# EAGLE board HominiPulseSensor_Panelized (EAGLE 8.0.1)
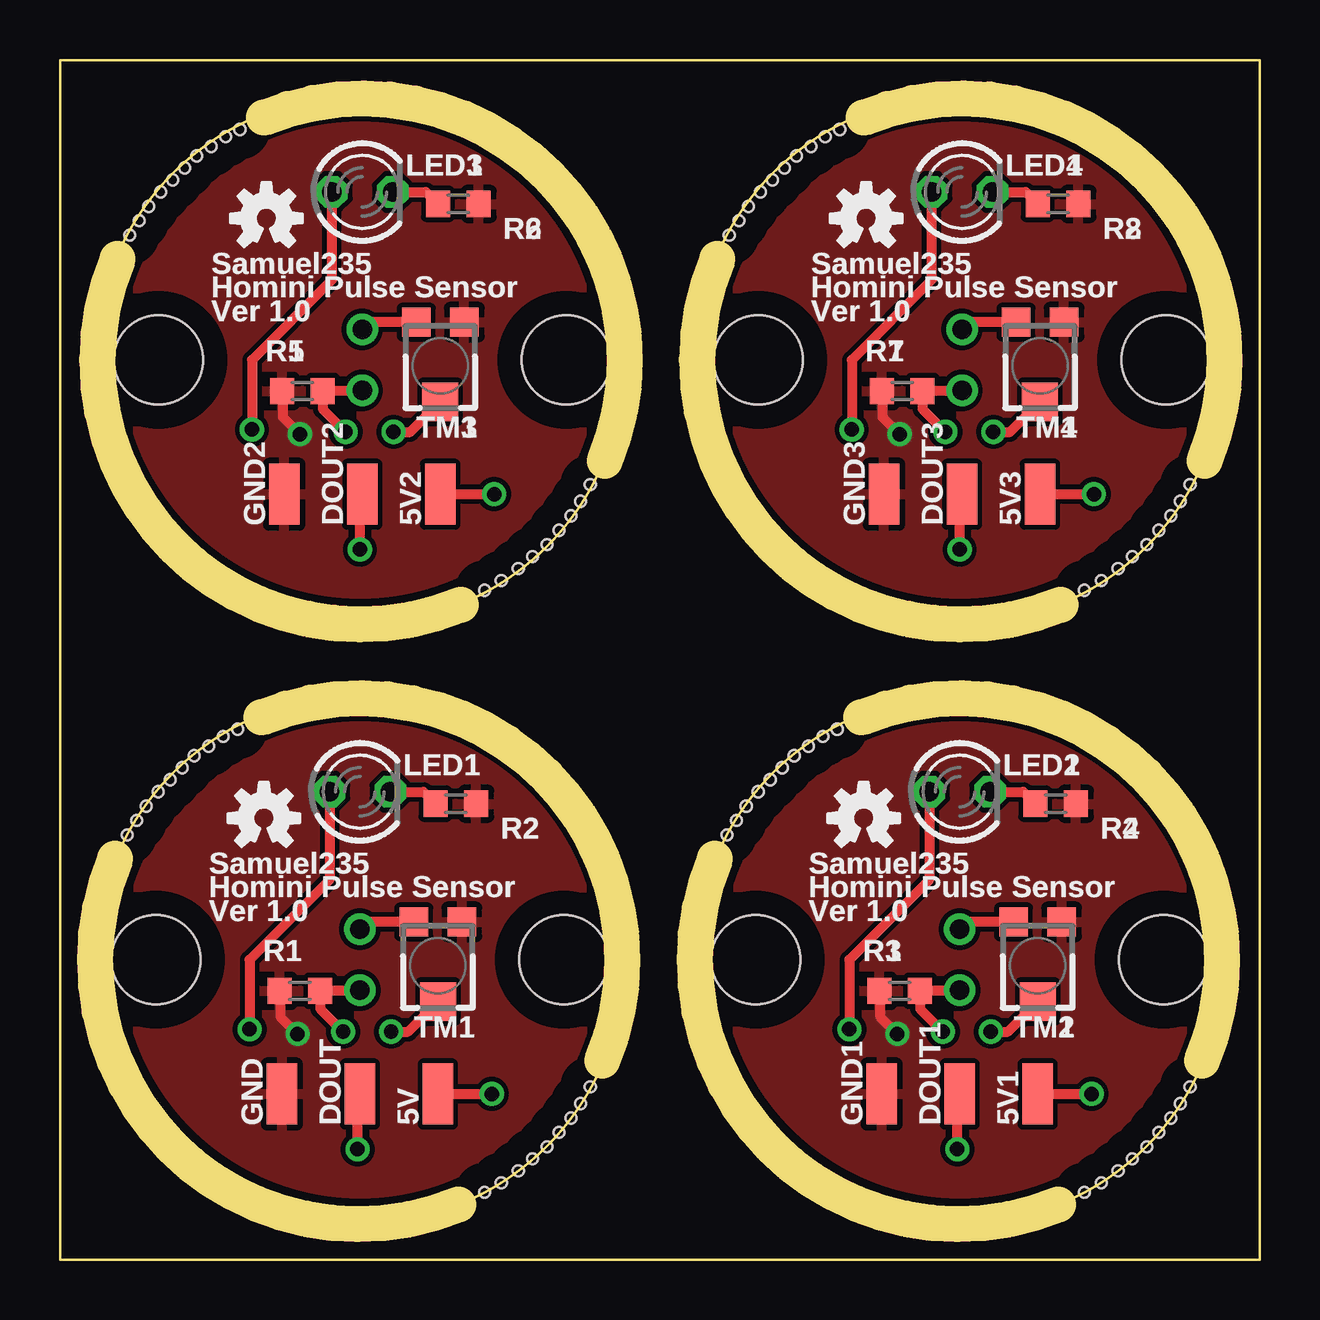
[diagram p0: board, top side]
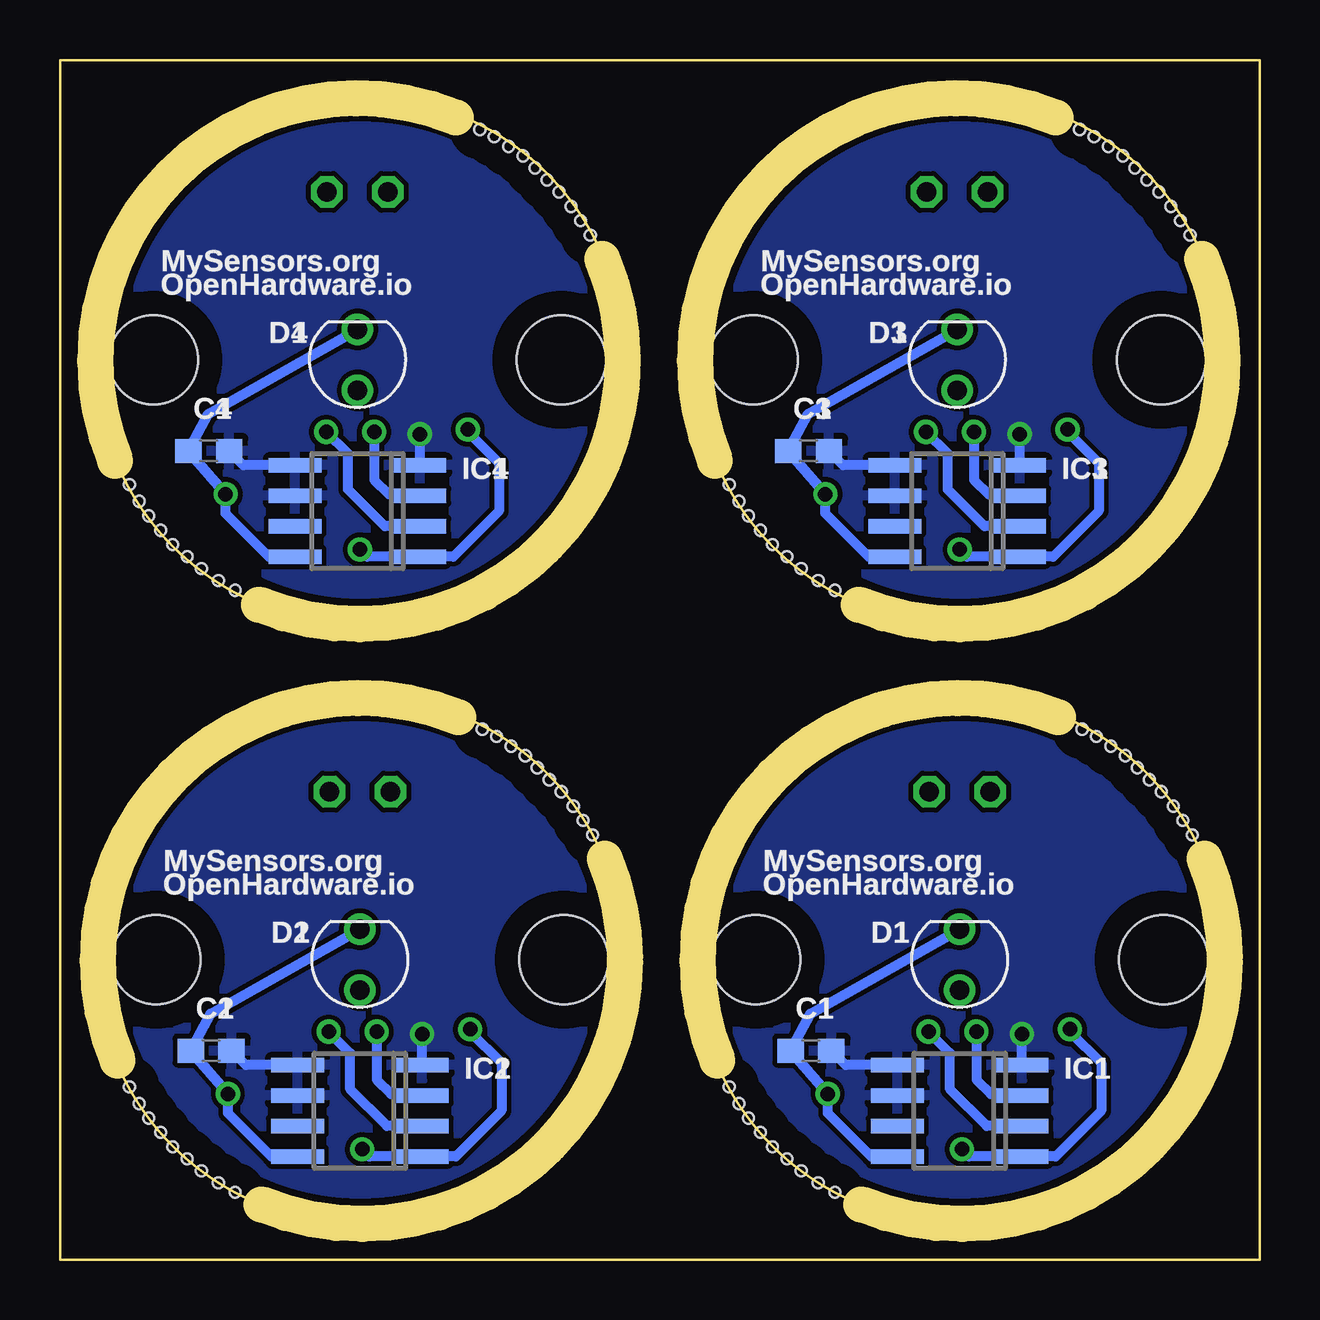
[diagram p1: board, bottom side, seen from below]

Size 50 x 50 mm. Coordinates in mm from the lower left corner, seen from the top.
Outline: 0,0 0,50 50,50 50,0 0,0
Outline: circle at 12.5,12.5 radius 11
Outline: circle at 37.5,12.5 radius 11
Outline: circle at 37.5,37.5 radius 11
Outline: circle at 12.5,37.5 radius 11
Copper layers (1*16): Top 0.035mm / dielectric 1.5mm / Bottom 0.035mm
Design rules "default *": minimum track width 10mil, minimum drill 0.3mm, track to track 8mil, track to pad 8mil, pad to pad 8mil, via to via 8mil, smd to smd 8mil, copper to edge 40mil, drill to drill 8mil, minimum pad ring 10mil, minimum via ring 8mil, stop-mask expansion 4mil, vias tented up to drill 0mil, thermal gap 10mil
Holes 3.7 mm at 4,12.5 21,12.5 29,12.5 46,12.5 4.1,37.5 21.1,37.5 29.1,37.5 46.1,37.5
Holes 0.45 mm at 21.7,6.5 17.7,2.8 22.1,7.2 2.8,17.7 7.4,22.1 3.2,18.3 3.6,18.9 4.1,19.5 4.6,20 5.1,20.5 5.6,21 6.2,21.4 6.8,21.8 18.4,3.2 19.1,3.7 19.7,4.2 20.3,4.7 20.8,5.3 21.3,5.9 46.7,31.6 42.7,27.9 47.1,32.3 27.9,42.7 32.5,47.1 28.3,43.3 28.7,43.9 29.2,44.5 29.7,45 30.2,45.5 30.7,46 31.3,46.4 31.9,46.8 43.4,28.3 44.1,28.8 44.7,29.3 45.3,29.8 45.8,30.4 46.3,31 46.7,6.5 42.7,2.8 47.1,7.2 27.8,17.7 32.4,22.1 28.2,18.3 28.6,18.9 29.1,19.5 29.6,20 30.1,20.5 30.6,21 31.2,21.4 31.8,21.8 43.4,3.2 44.1,3.7 44.7,4.2 45.3,4.7 45.8,5.3 46.3,5.9 21.7,31.6 17.7,27.9 22.1,32.3 2.9,42.7 7.5,47.1 3.3,43.3 3.7,43.9 4.2,44.5 4.7,45 5.2,45.5 5.7,46 6.3,46.4 6.9,46.8 18.4,28.3 19.1,28.8 19.7,29.3 20.3,29.8 20.8,30.4 21.3,31
Milling: 8 lines

## Footprints (pad centres in the part's own frame; a part is rotated, then mirrored left to right if it is on the bottom)
SMD1,27-2,54 = smd 1.27 x 2.54: 1 0,0
C0603 = smd 1.1 x 1: 1 -0.85,0; 2 0.85,0
3MM-PTH = drill 0.8: A -1.27,0; C 1.27,0
SO08 = smd 0.6 x 2.2: 1 -1.905,-2.6; 2 -0.635,-2.6; 3 0.635,-2.6; 4 1.905,-2.6; 5 1.905,2.6; 6 0.635,2.6; 7 -0.635,2.6; 8 -1.905,2.6
LED3MM = drill 0.813 octagon: A -1.27,0; K 1.27,0
R0603 = smd 1 x 1.1: 1 -0.85,0; 2 0.85,0
TC33X = smd 1.2 x 1.2: 1 -1,-1.825; 3 1,-1.825 | smd 1.5 x 1.6: 2 0,1.5

## Placement (x,y rotation side)
5V  [SMD1,27-2,54]  15.75,6.9 0 top
5V1  [SMD1,27-2,54]  40.75,6.9 0 top
5V2  [SMD1,27-2,54]  15.85,31.9 0 top
5V3  [SMD1,27-2,54]  40.85,31.9 0 top
C1  0.1uF  [C0603]  18.7,8.7 0 bottom
C2  0.1uF  [C0603]  43.7,8.7 0 bottom
C3  0.1uF  [C0603]  18.8,33.7 0 bottom
C4  0.1uF  [C0603]  43.8,33.7 0 bottom
D1  PD204-6C  [3MM-PTH]  12.5,12.5 90 bottom
D2  PD204-6C  [3MM-PTH]  37.5,12.5 90 bottom
D3  PD204-6C  [3MM-PTH]  12.6,37.5 90 bottom
D4  PD204-6C  [3MM-PTH]  37.6,37.5 90 bottom
DOUT  [SMD1,27-2,54]  12.5,6.9 0 top
DOUT1  [SMD1,27-2,54]  37.5,6.9 0 top
DOUT2  [SMD1,27-2,54]  12.6,31.9 0 top
DOUT3  [SMD1,27-2,54]  37.6,31.9 0 top
GND  [SMD1,27-2,54]  9.25,6.9 0 top
GND1  [SMD1,27-2,54]  34.25,6.9 0 top
GND2  [SMD1,27-2,54]  9.35,31.9 0 top
GND3  [SMD1,27-2,54]  34.35,31.9 0 top
IC1  LM393D  [SO08]  12.5,6.2 90 bottom
IC2  LM393D  [SO08]  37.5,6.2 90 bottom
IC3  LM393D  [SO08]  12.6,31.2 90 bottom
IC4  LM393D  [SO08]  37.6,31.2 90 bottom
LED1  Red  [LED3MM]  12.5,19.5 0 top
LED2  Red  [LED3MM]  37.5,19.5 0 top
LED3  Red  [LED3MM]  12.6,44.5 0 top
LED4  Red  [LED3MM]  37.6,44.5 0 top
LOGO1  OSHW-LOGOS  [OSHW-LOGO-S]  8.5,18.4 0 top
LOGO2  OSHW-LOGOS  [OSHW-LOGO-S]  33.5,18.4 0 top
LOGO3  OSHW-LOGOS  [OSHW-LOGO-S]  8.6,43.4 0 top
LOGO4  OSHW-LOGOS  [OSHW-LOGO-S]  33.6,43.4 0 top
R1  33k  [R0603]  10,11.2 0 top
R2  180R  [R0603]  16.5,19 180 top
R3  33k  [R0603]  35,11.2 0 top
R4  180R  [R0603]  41.5,19 180 top
R5  33k  [R0603]  10.1,36.2 0 top
R6  180R  [R0603]  16.6,44 180 top
R7  33k  [R0603]  35.1,36.2 0 top
R8  180R  [R0603]  41.6,44 180 top
TM1  10k  [TC33X]  15.75,12.25 180 top
TM2  10k  [TC33X]  40.75,12.25 180 top
TM3  10k  [TC33X]  15.85,37.25 180 top
TM4  10k  [TC33X]  40.85,37.25 180 top

## Library data of the parts
5V 5V1-5V3 DOUT DOUT1-DOUT3 GND GND1-GND3 = wirepad
C1-C4 R1-R8 = rcl
D1-D4 = Misc
IC1-IC4 = linear
LED1-LED4 = led
LOGO1-LOGO4 = SparkFun-Aesthetics
TM1-TM4 = adafruit

## Nets
+5V: 5V.1 C1.1 D1.C IC1.8 TM1.3
+5V1: 5V1.1 C2.1 D2.C IC2.8 TM2.3
+5V2: 5V2.1 C3.1 D3.C IC3.8 TM3.3
+5V3: 5V3.1 C4.1 D4.C IC4.8 TM4.3
GND: C1.2 GND.1 IC1.4 IC1.5 IC1.6 R1.1 R2.1 TM1.1
GND1: C2.2 GND1.1 IC2.4 IC2.5 IC2.6 R3.1 R4.1 TM2.1
GND2: C3.2 GND2.1 IC3.4 IC3.5 IC3.6 R5.1 R6.1 TM3.1
GND3: C4.2 GND3.1 IC4.4 IC4.5 IC4.6 R7.1 R8.1 TM4.1
N$1: D1.A IC1.3 R1.2
N$2: IC1.2 TM1.2
N$3: D2.A IC2.3 R3.2
N$4: DOUT.1 IC1.1 LED1.A
N$5: LED1.K R2.2
N$6: DOUT1.1 IC2.1 LED2.A
N$7: LED2.K R4.2
N$8: IC2.2 TM2.2
N$9: D3.A IC3.3 R5.2
N$10: DOUT2.1 IC3.1 LED3.A
N$11: LED3.K R6.2
N$12: IC3.2 TM3.2
N$13: D4.A IC4.3 R7.2
N$14: DOUT3.1 IC4.1 LED4.A
N$15: LED4.K R8.2
N$16: IC4.2 TM4.2

## Tracks (layer width: path | path; a pad name or v marks a point on that pad's centre or on a via)
+5V  (via drill 0.6)
  Top 0.406: 5V.1 v18,6.9 | TM1.3 12.8,14.07 D1.C
  Bottom 0.406: IC1.8 16.2,4.29 18,6.1 v18,6.9 C1.1 18.72,10.25 D1.C
+5V1  (via drill 0.6)
  Top 0.406: 5V1.1 v43,6.9 | TM2.3 37.8,14.07 D2.C
  Bottom 0.406: IC2.8 41.2,4.29 43,6.1 v43,6.9 C2.1 43.72,10.25 D2.C
+5V2  (via drill 0.6)
  Top 0.406: 5V2.1 v18.1,31.9 | TM3.3 12.9,39.08 D3.C
  Bottom 0.406: IC3.8 16.3,29.3 18.1,31.1 v18.1,31.9 C3.1 18.82,35.25 D3.C
+5V3  (via drill 0.6)
  Top 0.406: 5V3.1 v43.1,31.9 | TM4.3 37.91,39.08 D4.C
  Bottom 0.406: IC4.8 41.3,29.3 43.1,31.1 v43.1,31.9 C4.1 43.82,35.25 D4.C
GND  (via drill 0.6)
  Top 0.406: v9.9,9.4 9.2,10.1 9.2,11.15 R1.1
  Bottom 0.406: IC1.4 v9.9,9.4 | IC1.5 17.25,8.11 C1.2
  pour Top: 3.8,19.5 5.8,21.3 8,22.5 10.2,23.2 13.1,23.4 15.7,23 17.7,22.2 19.6,20.9 20.9,19.5 22.2,17.7 23,16 23.4,13.9 23.5,11.7 23.2,9.7 22.5,7.8 21.4,5.9 20.1,4.5 17.5,2.7 15.3,1.8 12.7,1.4 9.8,1.7 7.6,2.5 6.1,3.4 4.5,4.8 2.7,7.4 1.9,9.6 1.5,12.5 1.8,15.1 2.7,17.5
  pour Bottom: 4.3,20 6.1,21.5 8.1,22.5 9.9,23.2 12.2,23.5 14.9,23.2 17.5,22.3 19.4,21.1 20.8,19.7 22.2,17.7 23.1,15.5 23.5,13.1 23.4,11 23,9.1 22.1,6.9 21.3,5.8 20.4,4.9 18.6,3.3 17,2.5 15,1.7 12.5,1.5 10.4,1.7 8.5,2.3 7,2.9 5.7,3.8 4.4,5 3.3,6.5 2.4,8 1.9,9.6 1.5,11.2 1.5,13.6 2.1,16.2 3.1,18.3
GND1  (via drill 0.6)
  Top 0.406: v34.9,9.4 34.2,10.1 34.2,11.15 R3.1
  Bottom 0.406: IC2.4 v34.9,9.4 | IC2.5 42.26,8.11 C2.2
  pour Top: 28.8,19.5 30.8,21.3 33,22.5 35.2,23.2 38.1,23.4 40.7,23 42.7,22.2 44.6,20.9 45.9,19.5 47.2,17.7 48,16 48.4,13.9 48.5,11.7 48.2,9.7 47.5,7.8 46.4,5.9 45.1,4.5 42.5,2.7 40.3,1.8 37.7,1.4 34.8,1.7 32.6,2.5 31.1,3.4 29.5,4.8 27.7,7.4 26.9,9.6 26.5,12.5 26.8,15.1 27.7,17.5
  pour Bottom: 29.3,20 31.1,21.5 33.1,22.5 34.9,23.2 37.2,23.5 39.9,23.2 42.5,22.3 44.4,21.1 45.8,19.7 47.2,17.7 48.1,15.5 48.5,13.1 48.4,11 48,9.1 47.1,6.9 46.3,5.8 45.4,4.9 43.6,3.3 42,2.5 40,1.7 37.5,1.5 35.4,1.7 33.5,2.3 32,2.9 30.7,3.8 29.4,5 28.3,6.5 27.4,8 26.9,9.6 26.5,11.2 26.5,13.6 27.1,16.2 28.1,18.3
GND2  (via drill 0.6)
  Top 0.406: v10,34.4 9.3,35.1 9.3,36.15 R5.1
  Bottom 0.406: IC3.4 v10,34.4 | IC3.5 17.36,33.1 C3.2
  pour Top: 3.9,44.5 5.9,46.3 8.1,47.5 10.3,48.2 13.2,48.4 15.8,48 17.8,47.2 19.7,45.9 21,44.5 22.3,42.7 23.1,41 23.5,38.9 23.6,36.7 23.3,34.7 22.6,32.8 21.5,30.9 20.2,29.5 17.6,27.7 15.4,26.8 12.8,26.4 9.9,26.7 7.7,27.5 6.2,28.4 4.6,29.8 2.8,32.4 2,34.6 1.6,37.5 1.9,40.1 2.8,42.5
  pour Bottom: 4.4,45 6.2,46.5 8.2,47.5 10,48.2 12.3,48.5 15,48.2 17.6,47.3 19.5,46.1 20.9,44.7 22.3,42.7 23.2,40.5 23.6,38.1 23.5,36 23.1,34.1 22.2,31.9 21.4,30.8 20.5,29.9 18.7,28.3 17.1,27.5 15.1,26.7 12.6,26.5 10.5,26.7 8.6,27.3 7.1,27.9 5.8,28.8 4.5,30 3.4,31.5 2.5,33 2,34.6 1.6,36.2 1.6,38.6 2.2,41.2 3.2,43.3
GND3  (via drill 0.6)
  Top 0.406: v35,34.4 34.3,35.1 34.3,36.15 R7.1
  Bottom 0.406: IC4.4 v35,34.4 | IC4.5 42.35,33.1 C4.2
  pour Top: 28.9,44.5 30.9,46.3 33.1,47.5 35.3,48.2 38.2,48.4 40.8,48 42.8,47.2 44.7,45.9 46,44.5 47.3,42.7 48.1,41 48.5,38.9 48.6,36.7 48.3,34.7 47.6,32.8 46.5,30.9 45.2,29.5 42.6,27.7 40.4,26.8 37.8,26.4 34.9,26.7 32.7,27.5 31.2,28.4 29.6,29.8 27.8,32.4 27,34.6 26.6,37.5 26.9,40.1 27.8,42.5
  pour Bottom: 29.4,45 31.2,46.5 33.2,47.5 35,48.2 37.3,48.5 40,48.2 42.6,47.3 44.5,46.1 45.9,44.7 47.3,42.7 48.2,40.5 48.6,38.1 48.5,36 48.1,34.1 47.2,31.9 46.4,30.8 45.5,29.9 43.7,28.3 42.1,27.5 40.1,26.7 37.6,26.5 35.5,26.7 33.6,27.3 32.1,27.9 30.8,28.8 29.5,30 28.4,31.5 27.5,33 27,34.6 26.6,36.2 26.6,38.6 27.2,41.2 28.2,43.3
N$1  (via drill 0.6)
  Top 0.406: D1.A 12.47,11.2 R1.2 10.85,10.45 v11.8,9.5
  Bottom 0.406: v11.8,9.5 11.8,7.5 11.2,6.9 9.96,6.9 IC1.3
N$2  (via drill 0.6)
  Top 0.406: v13.8,9.5 14.5,9.5 TM1.2
  Bottom 0.406: IC1.2 11.37,5.57 12.9,7.1 12.9,8.6 v13.8,9.5
N$3  (via drill 0.6)
  Top 0.406: D2.A 37.47,11.2 R3.2 35.85,10.45 v36.8,9.5
  Bottom 0.406: v36.8,9.5 36.8,7.5 36.2,6.9 34.97,6.9 IC2.3
N$4  (via drill 0.6)
  Top 0.406: v12.4,4.6 12.4,6.8 DOUT.1 | LED1.A 11.23,15.83 7.9,12.5 v7.9,9.6
  Bottom 0.406: v12.4,4.6 12.1,4.29 IC1.1 8.5,4.3 6.6,6.2 6.6,8.2 7.9,9.5 v7.9,9.6
N$5
  Top 0.406: LED1.K 15.15,19.5 R2.2
N$6  (via drill 0.6)
  Top 0.406: v37.4,4.6 37.4,6.8 DOUT1.1 | LED2.A 36.23,15.83 32.9,12.5 v32.9,9.6
  Bottom 0.406: v37.4,4.6 37.09,4.29 IC2.1 33.5,4.3 31.6,6.2 31.6,8.2 32.9,9.5 v32.9,9.6
N$7
  Top 0.406: LED2.K 40.15,19.5 R4.2
N$8  (via drill 0.6)
  Top 0.406: v38.8,9.5 39.5,9.5 TM2.2
  Bottom 0.406: IC2.2 36.37,5.57 37.9,7.1 37.9,8.6 v38.8,9.5
N$9  (via drill 0.6)
  Top 0.406: D3.A 12.57,36.2 R5.2 10.95,35.45 v11.9,34.5
  Bottom 0.406: v11.9,34.5 11.9,32.5 11.3,31.9 10.06,31.9 IC3.3
N$10  (via drill 0.6)
  Top 0.406: v12.5,29.6 12.5,31.8 DOUT2.1 | LED3.A 11.33,40.83 8,37.5 v8,34.6
  Bottom 0.406: v12.5,29.6 12.2,29.3 IC3.1 8.6,29.3 6.7,31.2 6.7,33.2 8,34.5 v8,34.6
N$11
  Top 0.406: LED3.K 15.25,44.5 R6.2
N$12  (via drill 0.6)
  Top 0.406: v13.9,34.5 14.6,34.5 TM3.2
  Bottom 0.406: IC3.2 11.46,30.57 13,32.1 13,33.6 v13.9,34.5
N$13  (via drill 0.6)
  Top 0.406: D4.A 37.57,36.2 R7.2 35.95,35.45 v36.9,34.5
  Bottom 0.406: v36.9,34.5 36.9,32.5 36.3,31.9 35.06,31.9 IC4.3
N$14  (via drill 0.6)
  Top 0.406: v37.5,29.6 37.5,31.8 DOUT3.1 | LED4.A 36.33,40.83 33,37.5 v33,34.6
  Bottom 0.406: v37.5,29.6 37.2,29.3 IC4.1 33.6,29.3 31.7,31.2 31.7,33.2 33,34.5 v33,34.6
N$15
  Top 0.406: LED4.K 40.25,44.5 R8.2
N$16  (via drill 0.6)
  Top 0.406: v38.9,34.5 39.6,34.5 TM4.2
  Bottom 0.406: IC4.2 36.47,30.57 38,32.1 38,33.6 v38.9,34.5

## Text on the board
tNames: Samuel235 / Homini Pulse Sensor / Ver 1.0 | Samuel235 / Homini Pulse Sensor / Ver 1.0 | Samuel235 / Homini Pulse Sensor / Ver 1.0 | Samuel235 / Homini Pulse Sensor / Ver 1.0
bNames: MySensors.org / OpenHardware.io | MySensors.org / OpenHardware.io | MySensors.org / OpenHardware.io | MySensors.org / OpenHardware.io
_tNames: LED1 | LED1 | R2 | R2 | Samuel235 / Homini Pulse Sensor / Ver 1.0 | Samuel235 / Homini Pulse Sensor / Ver 1.0 | R1 | R1 | TM1 | TM1 | GND | DOUT | 5V | GND | DOUT | 5V | LED1 | LED1 | R2 | R2 | Samuel235 / Homini Pulse Sensor / Ver 1.0 | Samuel235 / Homini Pulse Sensor / Ver 1.0 | R1 | R1 | TM1 | TM1 | GND | DOUT | 5V | GND | DOUT | 5V
_bNames: MySensors.org / OpenHardware.io | MySensors.org / OpenHardware.io | D1 | D1 | C1 | C1 | IC1 | IC1 | MySensors.org / OpenHardware.io | MySensors.org / OpenHardware.io | D1 | D1 | C1 | C1 | IC1 | IC1